# Altium PCB daughterboard.PcbDoc
Units mil, origin at the board's own origin, x right, y up, seen from the top; angles counter-clockwise.
Board outline 2450 x 4500 mil, 4 copper layers (Top Layer, Mid-Layer 1, Mid-Layer 2, Bottom Layer); 52 components, 121 nets, 371 pads, 65 vias.
Unrouted connection lines stored in the file: 18.
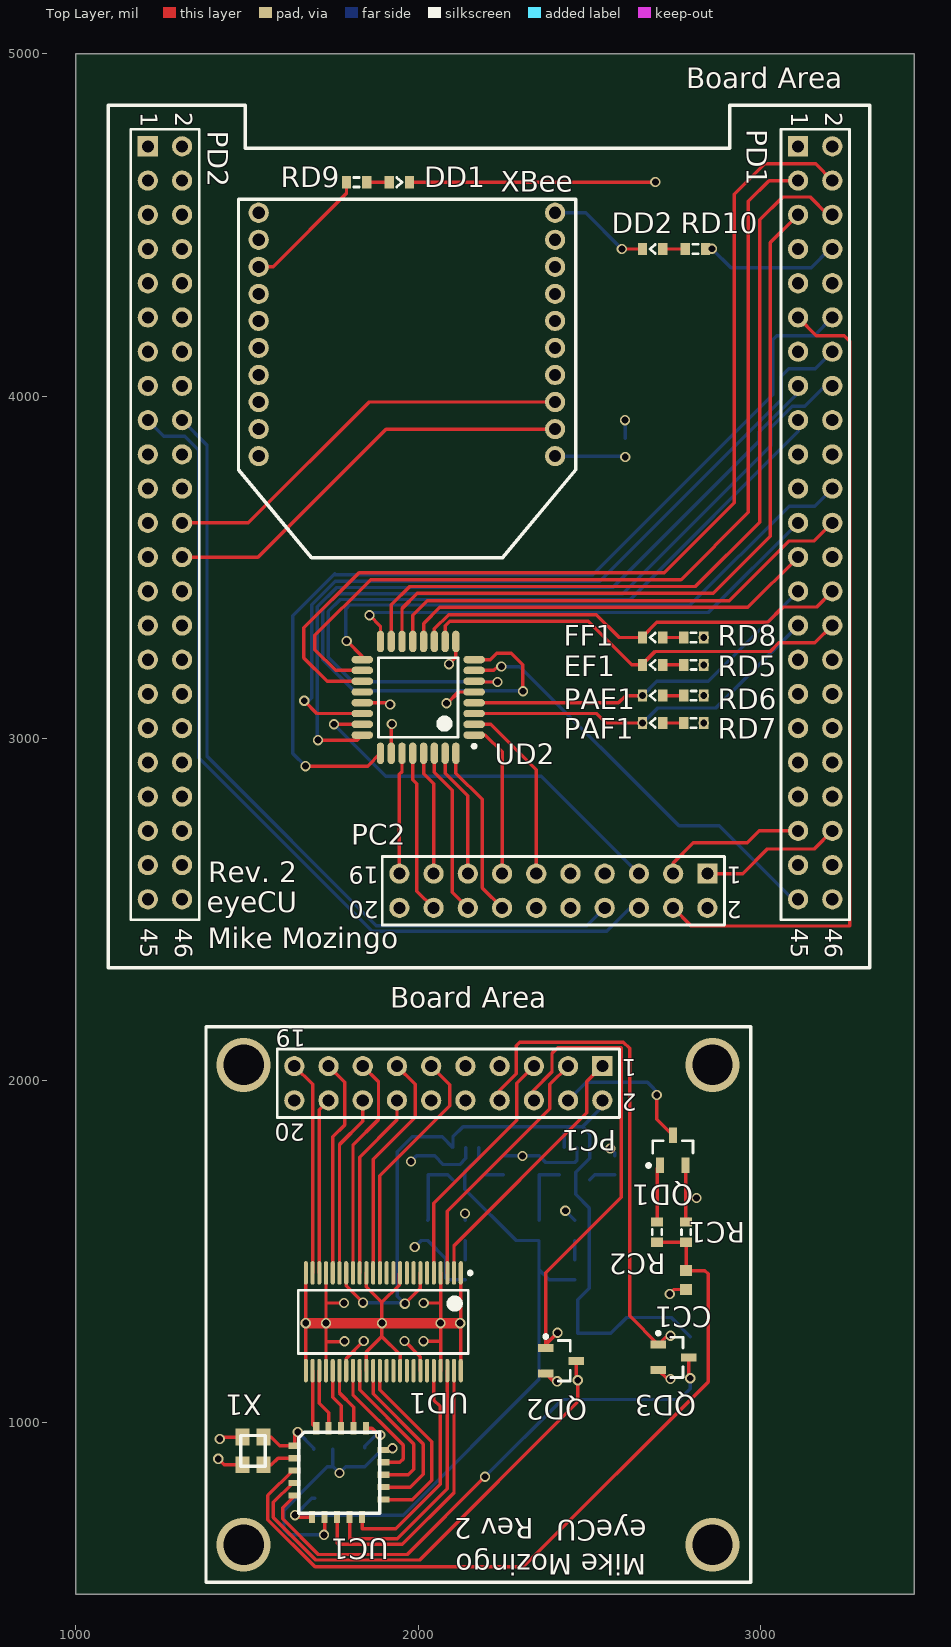
[diagram p0: Top Layer view]
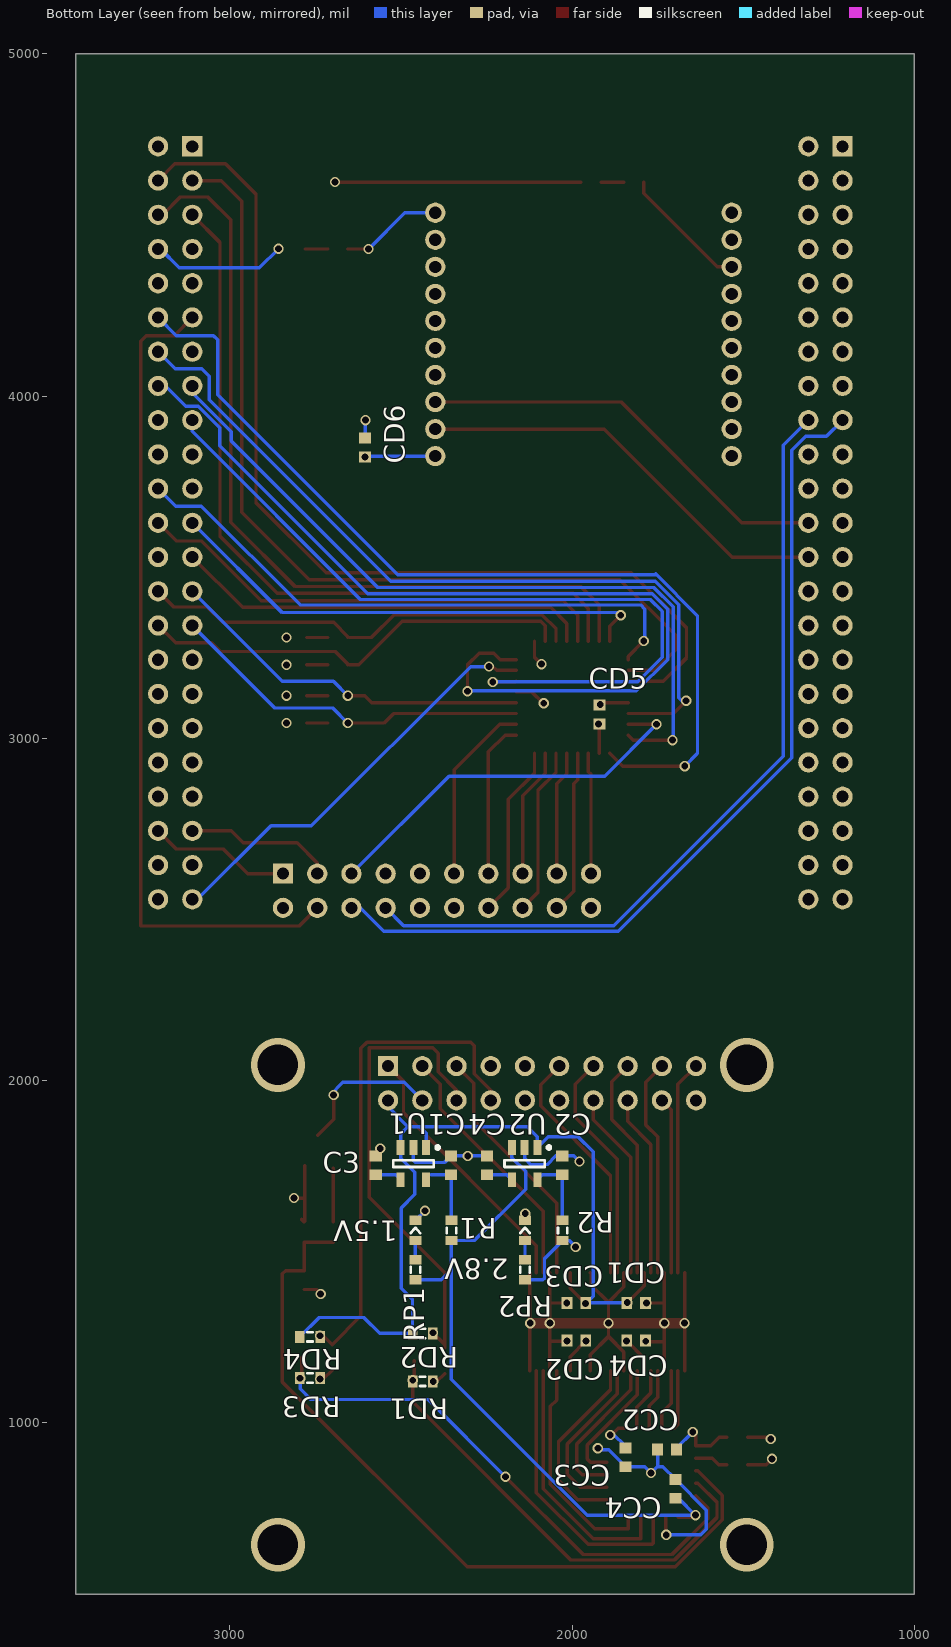
[diagram p1: Bottom Layer view, seen from below]
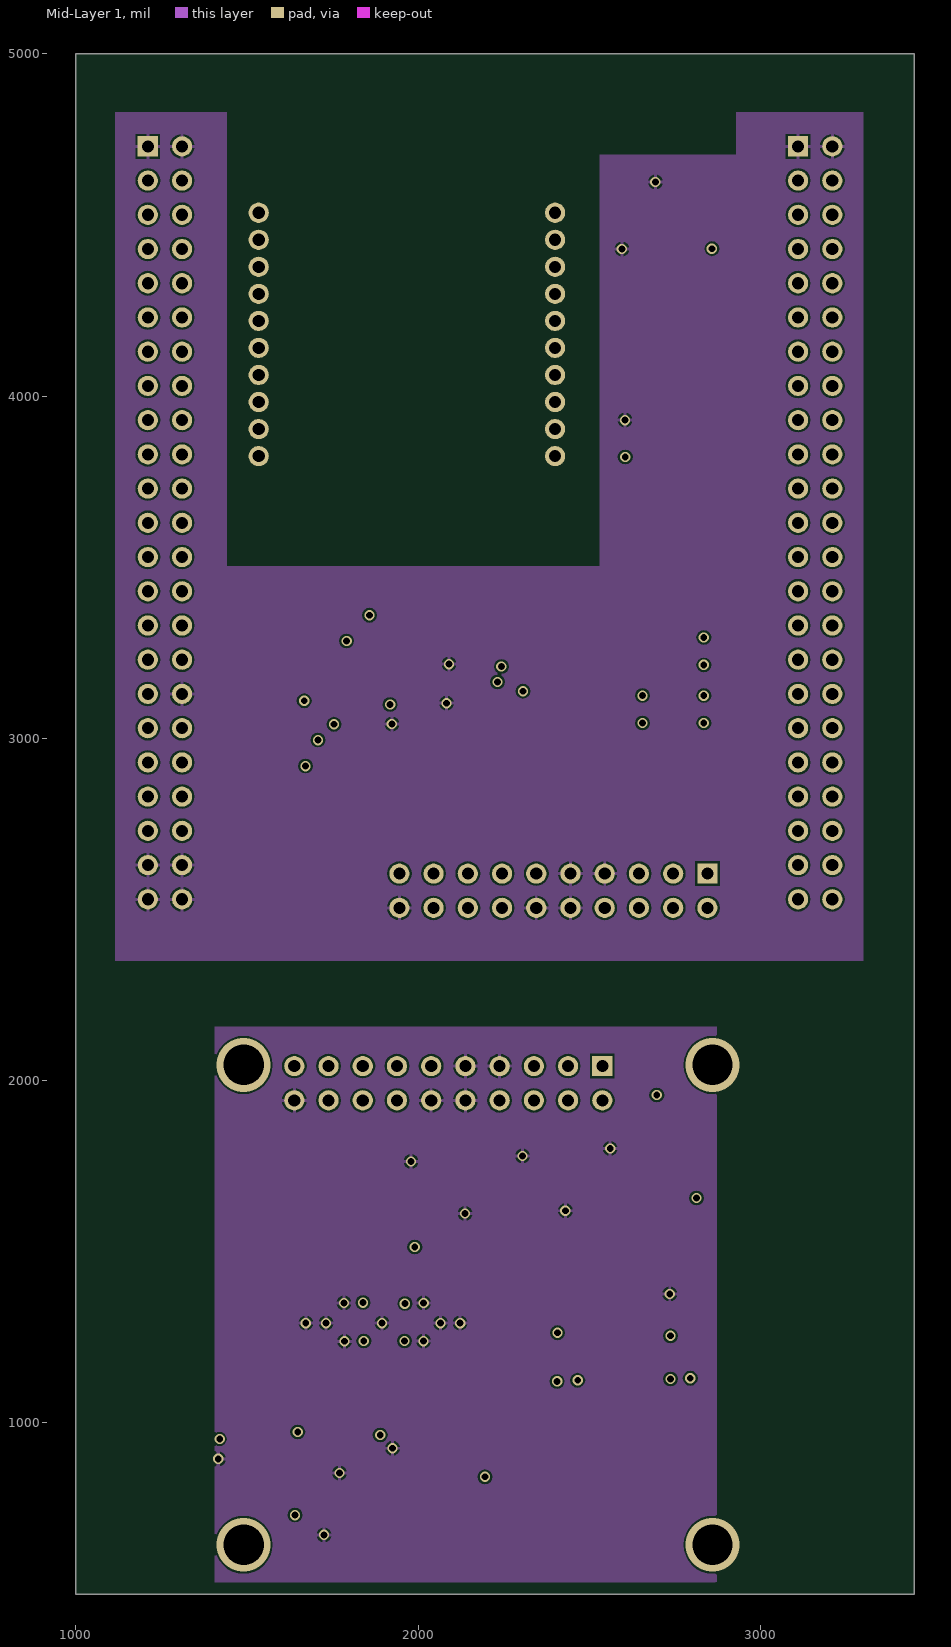
[diagram p2: Mid-Layer 1]
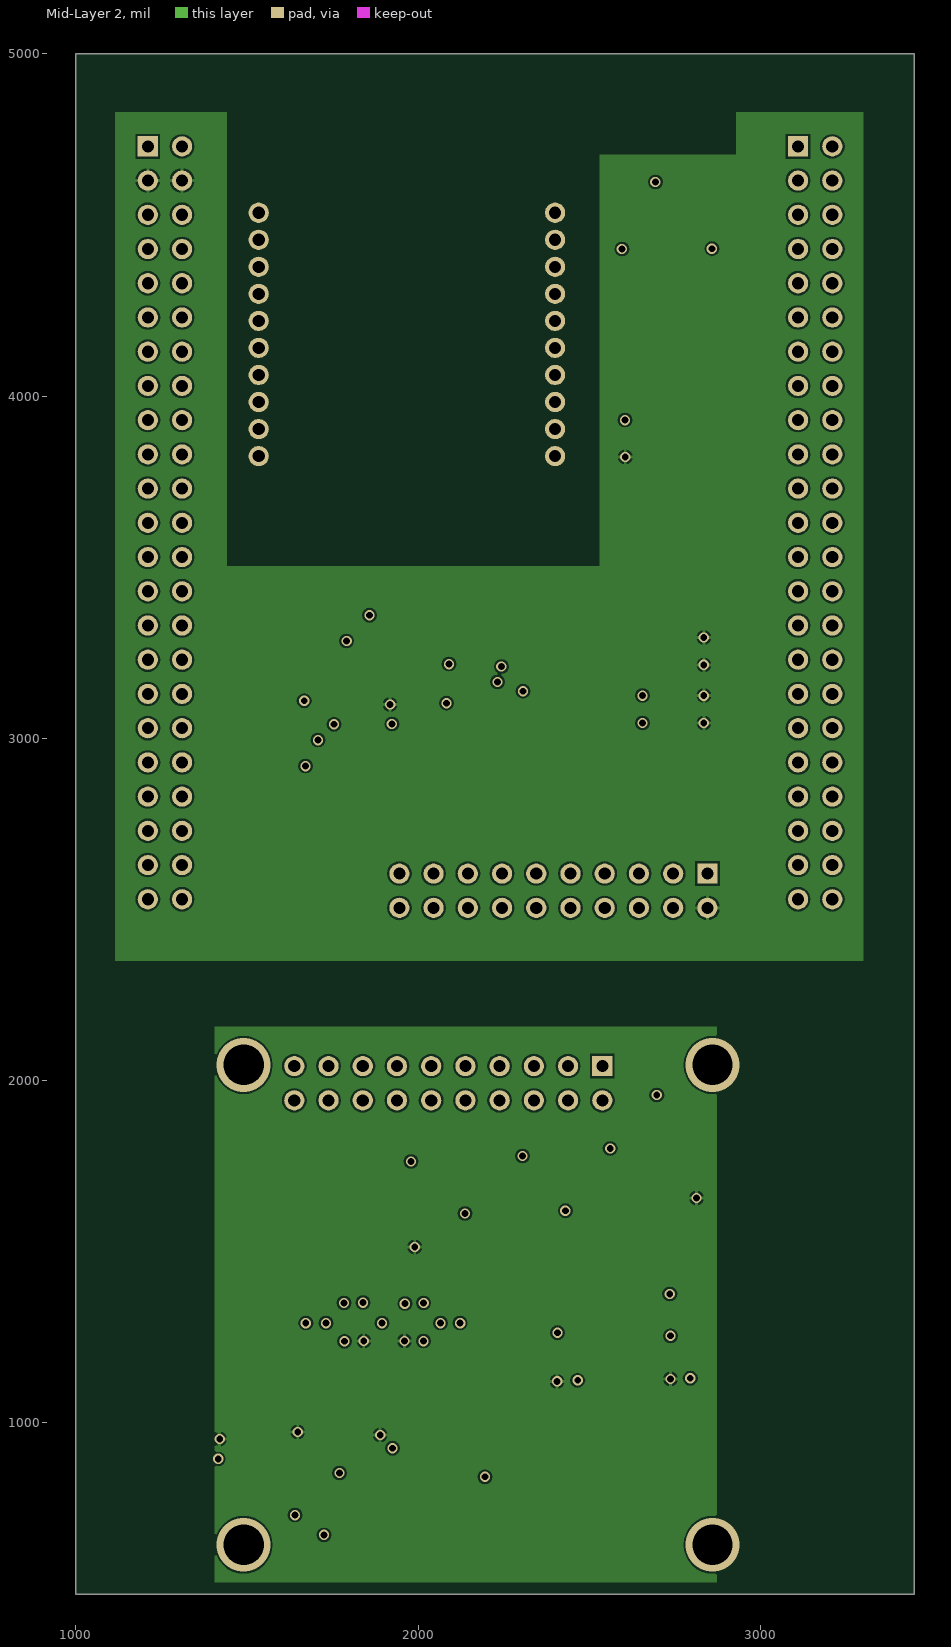
[diagram p3: Mid-Layer 2]

## Layer stack, top to bottom
Top Layer: signal copper 1.4
Dielectric: core 12.6, FR-4, Dk 4.8
Mid-Layer 1: signal copper 1.4
Dielectric: prepreg 12.6, FR-4, Dk 4.8
Mid-Layer 2: signal copper 1.4
Dielectric: core 12.6, FR-4, Dk 4.8
Bottom Layer: signal copper 1.4

## Board outline
1000,500 3450,500 3450,5000 1000,5000

## Design rules (kind name [scope] priority, off if disabled: settings)
Clearance [All] p1: gap=6
MinimumSolderMaskSliver [All] p1: minsoldermaskwidth=8
PolygonConnect [All] p1: connectstyle=Relief reliefconductorwidth=10 reliefentries=4 polygonreliefangle="90 Angle"
RoutingVias [All] p1: holewidth=20 width=30 viastyle="Through Hole" minholewidth=20 minwidth=30 maxholewidth=1000 maxwidth=1500
SilkToSilkClearance [All] p1 off: silktosilkclearance=8
SilkscreenOverComponentPads [All] p1 off: minsilkscreentomaskgap=8
SolderMaskExpansion [All] p1: expansion=4
Width [All] p1: maxlimit=100 minlimit=10 preferedwidth=10 minimp=50.000000 maximp=50.000000 favimp=50.000000
25 further rules are at their usual default settings.

## Classes and differential pairs
component class camera: 1.5V 2.8V C1 C2 C3 C4 CC1 CC2 CC3 CC4 CD1 CD2 CD3 CD4 PC1 QD1 QD2 QD3 R1 R2 RC1 RC2 RD1 RD2 RD3 RD4 RP1 RP2 U1 U2 UC1 UD1 X1
component class connections_to_beaglebone: CD4 DD1 DD2 PD1 PD2 RD9 RD10 XBee
component class CameraInterface: CD3 EF1 FF1 PAE1 PAF1 PC2 RD5 RD6 RD7 RD8 UD2

## Components (designator, comment, footprint, x,y, rotation, side; value= is the part's Value field where it differs from the comment)
1.5V "LED2" DIODE1608 2458,1562.53 r90 bottom
2.8V "LED2" DIODE1608 2138,1562.53 r90 bottom
C1 "Cap Semi" CAPC1608L 2354,1752.53 r90 bottom
C2 "Cap Semi" CAPC1608L 2029,1752.53 r90 bottom
C3 "Cap Semi" CAPC1608L 2574,1752.53 r90 bottom
C4 "Cap Semi" CAPC1608L 2249,1752.53 r90 bottom
CC1 "Cap Semi" CAPC1608L 2783,1417.53 r90 top
CC2 "Cap Semi" CAPC1608L 1723,922.53 r180 bottom
CC3 "Cap Semi" CAPC1608L 1844,899.53 r90 bottom
CC4 "Cap Semi" CAPC1608L 1698,807.53 r270 bottom
CD1 "Cap Semi" CAPC1608L 1813,1350.53 r0 bottom
CD2 "Cap Semi" CAPC1608L 1988,1240.53 r180 bottom
CD3 "Cap Semi" CAPC1608L 1988,1350.53 r180 bottom
CD4 "Cap Semi" CAPC1608L 1813,1240.53 r0 bottom
CD5 "Cap Semi" CAPC1608L 1920,3070 r90 bottom
CD6 "Cap Semi" CAPC1608L 2605,3850 r270 bottom
DD1 "LED2" DIODE1608 1945,4625 r0 top
DD2 "LED2" DIODE1608 2685,4430 r180 top
EF1 "LED2" DIODE1608 2685,3215 r180 top
FF1 "LED2" DIODE1608 2685,3295 r180 top
PAE1 "LED2" DIODE1608 2685,3125 r180 top
PAF1 "LED2" DIODE1608 2685,3045 r180 top
PC1 "Header 10X2" HDR2X10 2538,2042.53 r180 top
PC2 "Header 10X2" HDR2X10 2845,2605 r180 top
PD1 "Header 2x23" HDR2X23 3110,4730 r270 top
PD2 "Header 2x23" HDR2X23 1210,4730 r270 top
QD1 "MOSFET-N" SOT95P240-3N 2744,1796.53 r90 top
QD2 "MOSFET-N" SOT95P240-3N 2417,1181.53 r0 top
QD3 "MOSFET-N" SOT95P240-3N 2746,1191.53 r0 top
R1 "Res Semi" RESC1608L 2353,1562.53 r270 bottom
R2 "Res Semi" RESC1608L 2028,1562.53 r270 bottom
RC1 "Res3" RESC1608L 2783,1557.53 r90 top
RC2 "Res3" RESC1608L 2698,1557.53 r270 top
RD1 "Res3" RESC1608L 2437,1121.53 r0 bottom
RD2 "Res3" RESC1608L 2437,1261.53 r180 bottom
RD3 "Res3" RESC1608L 2766,1131.53 r0 bottom
RD4 "Res3" RESC1608L 2766,1251.53 r180 bottom
RD5 "Res3" RESC1608L 2805,3215 r0 top
RD6 "Res3" RESC1608L 2805,3125 r0 top
RD7 "Res3" RESC1608L 2805,3045 r0 top
RD8 "Res3" RESC1608L 2805,3295 r0 top
RD9 "Res3" RESC1608L 1820,4625 r180 top
RD10 "Res3" RESC1608L 2810,4430 r0 top
RP1 "Res3" RESC1608L 2458,1447.53 r90 bottom
RP2 "Res3" RESC1608L 2138,1447.53 r270 bottom
U1 "TPS79915DDC" TSOT23-5 2464,1757.53 r270 bottom
U2 "TPS79928DDC" TSOT23-5 2139,1757.53 r270 bottom
UC1 "TCM8230MD_1" TCM8230MD 1769,854.53 r90 top
UD1 "SN74LVCH16T245" SN74LVCH16T245 1898,1295.53 r270 top
UD2 "IDT72V241L10PF" IDT72V241L10PF 2000,3120 r180 top
X1 "KC2520B-C1 Series" KC2520B-C1 1489,954.53 r270 top
XBee "XBee" XBee 2400,3825 r180 top

## Footprints (in the part's own frame and the unit in brackets; to place one, negate y for a bottom-side part, rotate by r counter-clockwise, add the part's x,y. Pads: shape width x height; smd on the part's side, far side on the other; paste and mask are expansions set on the pad)
CAPC1608L [mm] "Chip Capacitor, Body 1.6x0.8mm, IPC High Density"
  rect 0.8x0.9 smd: 1(-0.7,0) 2(0.7,0)
  body extent -0.87,-0.48 0.87,0.48, height 1.3
DIODE1608 [mm] "Chip Resistor, Body 1.6x0.8mm, IPC High Density"
  rect 0.7x0.9 smd: 1(-0.75,0) 2(0.75,0)
  silkscreen extent -0.2,-0.35 0.2,0.35, body extent -0.85,-0.48 0.85,0.48, height 0.9
HDR2X10 [mm] "Connector; Header; 10x2 Position"
  rect 1.5x1.5 hole 0.9: 1(0,0)
  round 1.5 hole 0.9: 2(0,2.54) 3(2.54,0) 4(2.54,2.54) 5(5.08,0) 6(5.08,2.54) 7(7.62,0) 8(7.62,2.54) 9(10.16,0) 10(10.16,2.54) 11(12.7,0) 12(12.7,2.54) 13(15.24,0) 14(15.24,2.54) 15(17.78,0) 16(17.78,2.54) 17(20.32,0) 18(20.32,2.54) 19(22.86,0) 20(22.86,2.54)
  silkscreen extent -1.27,-1.27 24.13,3.81
HDR2X23 [mm] "Connector; Header; 25x2 Position"
  rect 1.5x1.5 hole 0.9: 1(0,0)
  round 1.5 hole 0.9: 2(0,2.54) 3(2.54,0) 4(2.54,2.54) 5(5.08,0) 6(5.08,2.54) 7(7.62,0) 8(7.62,2.54) 9(10.16,0) 10(10.16,2.54) 11(12.7,0) 12(12.7,2.54) 13(15.24,0) 14(15.24,2.54) 15(17.78,0) 16(17.78,2.54) 17(20.32,0) 18(20.32,2.54) 19(22.86,0) 20(22.86,2.54) 21(25.4,0) 22(25.4,2.54) 23(27.94,0) 24(27.94,2.54) 25(30.48,0) 26(30.48,2.54) 27(33.02,0) 28(33.02,2.54) 29(35.56,0) 30(35.56,2.54) 31(38.1,0) 32(38.1,2.54) 33(40.64,0) 34(40.64,2.54) 35(43.18,0) 36(43.18,2.54) 37(45.72,0) 38(45.72,2.54) 39(48.26,0) 40(48.26,2.54) 41(50.8,0) 42(50.8,2.54) 43(53.34,0) 44(53.34,2.54) 45(55.88,0) 46(55.88,2.54)
  silkscreen extent -1.27,-1.27 57.4,3.81
IDT72V241L10PF [mm] "TQFP, 32-Leads, Body 9.0x9.0mm (max), Pitch 0.80mm, IPC Medium Density"
  oval 1.6x0.55 smd: 1(-4.15,2.8) 2(-4.15,2) 3(-4.15,1.2) 4(-4.15,0.4) 5(-4.15,-0.4) 6(-4.15,-1.2) 7(-4.15,-2) 8(-4.15,-2.8) 17(4.15,-2.8) 18(4.15,-2) 19(4.15,-1.2) 20(4.15,-0.4) 21(4.15,0.4) 22(4.15,1.2) 23(4.15,2) 24(4.15,2.8)
  oval 0.55x1.6 smd: 9(-2.8,-4.15) 10(-2,-4.15) 11(-1.2,-4.15) 12(-0.4,-4.15) 13(0.4,-4.15) 14(1.2,-4.15) 15(2,-4.15) 16(2.8,-4.15) 25(2.8,4.15) 26(2,4.15) 27(1.2,4.15) 28(0.4,4.15) 29(-0.4,4.15) 30(-1.2,4.15) 31(-2,4.15) 32(-2.8,4.15)
  silkscreen extent -4.28,-2.95 2.95,3.75, body extent -3.5,-3.5 3.5,3.5, height 1.6
KC2520B-C1 [mm] "Oscillator KYOCERA"
  rect 1.25x1.05 smd: 1(-0.1,-0.05) 2(1.95,-0.05) 3(1.95,1.5) 4(-0.1,1.5)
  silkscreen extent -0.23,-0.18 2.07,1.62
RESC1608L [mm] "Chip Resistor, Body 1.6x0.8mm, IPC High Density"
  rect 0.7x0.9 smd: 1(-0.75,0) 2(0.75,0)
  silkscreen extent -0.2,-0.35 0.2,0.35, body extent -0.85,-0.48 0.85,0.48, height 0.9
SN74LVCH16T245 [mm]
  oval 1.75x0.3 smd: 1(-3.625,5.75) 2(-3.625,5.25) 3(-3.625,4.75) 4(-3.625,4.25) 5(-3.625,3.75) 6(-3.625,3.25) 7(-3.625,2.75) 8(-3.625,2.25) 9(-3.625,1.75) 10(-3.625,1.25) 11(-3.625,0.75) 12(-3.625,0.25) 13(-3.625,-0.25) 14(-3.625,-0.75) 15(-3.625,-1.25) 16(-3.625,-1.75) 17(-3.625,-2.25) 18(-3.625,-2.75) 19(-3.625,-3.25) 20(-3.625,-3.75) 21(-3.625,-4.25) 22(-3.625,-4.75) 23(-3.625,-5.25) 24(-3.625,-5.75) 25(3.625,-5.75) 26(3.625,-5.25) 27(3.625,-4.75) 28(3.625,-4.25) 29(3.625,-3.75) 30(3.625,-3.25) 31(3.625,-2.75) 32(3.625,-2.25) 33(3.625,-1.75) 34(3.625,-1.25) 35(3.625,-0.75) 36(3.625,-0.25) 37(3.625,0.25) 38(3.625,0.75) 39(3.625,1.25) 40(3.625,1.75) 41(3.625,2.25) 42(3.625,2.75) 43(3.625,3.25) 44(3.625,3.75) 45(3.625,4.25) 46(3.625,4.75) 47(3.625,5.25) 48(3.625,5.75)
  silkscreen extent -3.75,-6.3 2.35,6.58, body extent -3.1,-6.3 3.1,6.3, height 1.2
SOT95P240-3N [mm] "SOT23, 3-Leads, Body 2.9x1.3mm, Pitch 0.95mm, Lead Span 2.4mm, IPC Medium Density"
  rect 1.15x0.6 smd: 1(-1.125,0.95) 2(-1.125,-0.95) 3(1.125,0)
  silkscreen extent -1.25,-1.5 0.7,1.92, body extent -0.7,-1.5 0.7,1.5, height 1.14
TCM8230MD [mm] "VGA CAMERA MODULE 640x480"
  rect 0.45x0.6 on Top Overlay: 0(-2.275,-1.4) 0(-1.625,-1.4) 0(-0.975,-1.4) 0(-0.325,1.4) 0(-0.325,-1.4) 0(0.325,1.4) 0(0.325,-1.4) 0(0.975,1.4) 0(1.625,1.4) 0(2.275,1.4)
  rect 0.6x0.45 on Top Overlay: 0(-1.4,1.625) 0(-1.4,2.275) 0(-1.4,-0.325) 0(-1.4,0.325) 0(-1.4,0.975) 0(1.4,-0.975) 0(1.4,-0.325) 0(1.4,0.325) 0(1.4,-2.275) 0(1.4,-1.625)
  rect 0.45x0.9 smd: 1(2,3.3) 2(1.075,3.3) 3(0.15,3.3) 4(-0.775,3.3) 5(-1.7,3.3) 11(-2,-3.3) 12(-1.075,-3.3) 13(-0.15,-3.3) 14(0.775,-3.3) 15(1.7,-3.3)
  rect 0.9x0.45 smd: 6(-3.3,2) 7(-3.3,1.075) 8(-3.3,0.15) 9(-3.3,-0.775) 10(-3.3,-1.7) 16(3.3,-2) 17(3.3,-1.075) 18(3.3,-0.15) 19(3.3,0.775) 20(3.3,1.7)
  silkscreen extent -3,-3 3,3
TSOT23-5 [mm] "SOT23, 5-Leads, Body 3.0x3.0mm (max), Pitch 0.95mm, IPC Medium Density"
  rect 1.1x0.6 smd: 1(-1.2,0.95) 2(-1.2,0) 3(-1.2,-0.95) 4(1.2,-0.95) 5(1.2,0.95)
  silkscreen extent -1.32,-1.5 0.25,1.92, body extent -0.87,-1.52 0.87,1.53, height 1.1
XBee [mm]
  round 1.5 hole 0.9: 1(0,0) 2(0,-2.007) 3(0,-4.013) 4(0,-6.02) 5(0,-8.026) 6(0,-10.033) 7(0,-12.04) 8(0,-14.046) 9(0,-16.053) 10(0,-18.059) 11(21.996,-18.059) 12(21.996,-16.053) 13(21.996,-14.046) 14(21.996,-12.04) 15(21.996,-10.033) 16(21.996,-8.026) 17(21.996,-6.02) 18(21.996,-4.013) 19(21.996,-2.007) 20(21.996,0)
  silkscreen extent -1.52,-19.06 23.5,7.53, body extent -1.65,-19.18 23.62,7.62, height 2.79

## Part data
1.5V 2.8V DD1 DD2 EF1 FF1 PAE1 PAF1: "Typical RED, GREEN, YELLOW, AMBER GaAs LED"
C1 C2 C3 C4 CC1 CC2 CC3 CC4 CD1 CD2 CD3 CD4 CD5 CD6: "Capacitor (Semiconductor SIM Model)"
PC1 PC2: "Header, 10-Pin, Dual row"
QD1 QD2 QD3: "N-Channel MOSFET"
R1 R2: "Semiconductor Resistor"
RC1 RC2 RD1 RD2 RD3 RD4 RD5 RD6 RD7 RD8 RD9 RD10 RP1 RP2: "Resistor"
U1 U2: library part TPS799xxDDC, "200mA, Low Quiescent Current, Ultra-Low Noise, High PSRR  Low Dropout Linear Regulator"
UC1: "VGA CAMERA MODULE 640x480"
UD1: "16-bit bus transceiver with voltage regulation."
UD2: "36K (4K x 9) FIFO Buffer"
X1: library part KC2520B-C1, "Standard Oscillator"
XBee: "XBee wireless transmitter/reveiver"

## Via types
v1: diameter 30, hole 20, Top Layer to Bottom Layer, 61 vias
v2: diameter 157.48, hole 118.11, Top Layer to Bottom Layer, 4 vias

## Nets (pads, with @x,y where several pads share a name; then routed paths per layer and width w, separated by ;. In a path a pad name is that pad's centre, name@x,y a point inside that pad or via, vN(x,y) a via of type N, cw(c..) or ccw(c..) an arc to the next point about the centre after c; other vN are vias at no path point)
\R\E\N\1\: PD1.17 UD2.6 | length 2351.8
  Top Layer w10: UD2.6 2165.63,3165 v1(2232,3165)
  Bottom Layer w10: v1@2232,3166 1808,3166 1737,3237 1737,3371 1772,3406 2619,3406 3110,3897 PD1.17
\R\E\N\2\: PD1.16 UD2.8 | length 2802.2
  Top Layer w10: UD2.8 2210.24,3230.24 2229,3249 2272,3249 2306,3215 v1(2306,3138)
  Bottom Layer w10: v1@2306.77,3139 1812.37,3139 1721,3230.37 1721,3377.63 1766.37,3423 2598,3423 3030,3855 3030,3907.31 3093.21,3970.53 3129.53,3970.53 3189,4030 PD1.16
\R\S\: PD1.12 UD2.25 | length 2720.5
  Top Layer w10: v1(1671,2919) 1852.15,2919 UD2.25
  Bottom Layer w10: v1(1671,2919) 1634,2956 1634,3358.51 1756.49,3481 ; 1753.49,3478 2510,3478 ; 2513,3481 3036,4004 3036,4165 3048,4177 3157,4177 PD1.12
\W\E\N\1\: PD1.15 UD2.24 | length 2225.8
  Top Layer w10: v1(1707,2995) 1821.85,2995 UD2.24
  Bottom Layer w10: v1(1707,2995) 1705,2997 1705,3384.25 1761.75,3441 2568,3441 2996,3869 2996,3895.94 3110,4009.94 PD1.15
AIN0: PD2.39
AIN1: PD2.40
AIN2: PD2.37
AIN3: PD2.38
AIN4: PD2.33
AIN5: PD2.36
AIN6: PD2.35
C1_CLK: UC1.2 X1.3 | length 98.9
  Top Layer w10: X1.3 1571.23,877.76 1590.32,896.85 UC1.2
C1_DOUT0: PC1.11 PC2.11 UD1.13 UD2.2 | length 1250.9
  Top Layer w10: UD1.13 1888.16,1722.69 2092,1926.53 2092,1988.53 PC1.11 ; UD2.2 2211.74,3041.26 2345,2908 PC2.11
C1_DOUT1: PC1.13 PC2.13 UD1.14 UD2.1 | length 1134.8
  Top Layer w10: UD1.14 1868.47,1771 1991,1893.53 1991,1989.53 PC1.13 ; UD2.1 2196.24,3009.76 2245,2961 PC2.13
C1_DOUT2: PC1.14 PC2.14 UD1.16 UD2.32 | length 1056.8
  Top Layer w10: UD1.16 1829.1,1776.63 1938,1885.53 PC1.14 ; UD2.32 2110.24,2898.76 2187,2822 2187,2563 PC2.14
C1_DOUT3: PC1.15 PC2.15 UD1.17 UD2.31 | length 1033.3
  Top Layer w10: UD1.17 1809.42,1811.94 1884,1886.53 1884,1996.53 PC1.15 ; UD2.31 2078.74,2898.26 2145,2832 PC2.15
C1_DOUT4: PC1.16 PC2.16 UD1.19 UD2.30 | length 1024.5
  Top Layer w10: UD1.19 1770.05,1813.57 1838,1881.53 PC1.16 ; UD2.30 2047.24,2901.76 2100,2849 2100,2550 PC2.16
C1_DOUT5: PC1.17 PC2.17 UD1.20 UD2.29 | length 1001.8
  Top Layer w10: PC1.17 1785,1995.53 1785,1870.53 1750.36,1835.89 UD1.20 ; UD2.29 2015.75,2897.25 2045,2868 PC2.17
C1_DOUT6: PC1.18 PC2.18 UD1.22 UD2.28 | length 992.2
  Top Layer w10: UD1.22 1710.99,1915.52 PC1.18 ; UD2.28 1984.25,2879.75 1996,2868 1996,2554 PC2.18
C1_DOUT7: PC1.19 PC2.19 UD1.23 UD2.27 | length 981.2
  Top Layer w10: PC1.19 1691.31,1989.22 UD1.23 ; PC2.19 1945,2895 1952.76,2902.76 UD2.27
C1_RST: PC1.4 PC2.4 PD1.11 QD1.3 | length 2916.4
  Top Layer w10: v1(2697,1958) 2707.47,1958 2697,1968.47 2697,1887.82 QD1.3 ; PC2.4 2798,2452 3261,2452 3261,4161 3245,4177 3163,4177 PD1.11
  Bottom Layer w10: PC1.4 2491,1995.53 2669.94,1995.53 2707.47,1958 v1(2697,1958)
C_DCLK: UC1.10 UD1.44 | length 655.8
  Top Layer w10: UC1.10 1835.93,690.6 1934.07,690.6 2064,820.53 2064,1048.53 2045.64,1066.89 UD1.44
C_HD: UC1.9 UD1.46 | length 755
  Top Layer w10: UC1.9 1799.51,661.04 1938.51,661.04 2085.01,807.54 UD1.46
C_HORIZONTALSYNC: PC1.3 PC2.3 PD1.41 UD1.3 | length 1185.4
  Top Layer w10: UD1.3 2085.01,1618.54 2385,1918.53 2385,1989.53 PC1.3 ; PC2.3 2745,2636 2804,2695 2961,2695 2996,2730 PD1.41
C_SCL: QD2.3 RD1.2 UC1.4 | length 1383.2
  Top Layer w10: UC1.4 1633.36,824.02 1577,767.65 1577,723.63 1701.1,599.53 2004,599.53 2466,1061.53 v1(2466,1124.53) 2461.29,1129.24 QD2.3
C_SDA: QD3.3 RD3.2 UC1.5 | length 1611.6
  Top Layer w10: UC1.5 1604,752.52 1604,720 1708.47,615.53 1968,615.53 v1(2195,842.53) ; QD3.3 2790.29,1135.24 v1(2795,1130.53)
  Bottom Layer w10: v1(2195,842.53) 2421,1068.53 2764,1068.53 2795,1099.53 v1(2795,1130.53) RD3.2@2795.53,1131.06
C_SDCLK: PC1.5 PC2.5 UD1.5 UD2.23 | length 1880.2
  Top Layer w10: v1(1753.74,3041.26) UD2.23 ; UD1.5 2045.64,1642.17 2288,1884.53 2288,1992.53 PC1.5
  Bottom Layer w10: v1(1753.74,3041.26) 1905,2890 2360,2890 PC2.5
C_VD: UC1.8 UD1.47 | length 838.4
  Top Layer w10: UC1.8 1763.09,648.43 1766.49,645.04 1953.51,645.04 2104.69,796.22 UD1.47
C_VERTICALSYNC: PC1.1 PC2.1 PD1.42 UD1.2 | length 1200.5
  Top Layer w10: UD1.2 2104.69,1518.22 2493,1906.53 2493,1997.53 PC1.1 ; PC2.1 2948,2605 3020,2677 3157,2677 PD1.42
CAMERA_D0: PD1.25 UD2.12 | length 1227.1
  Top Layer w10: UD2.12 2015.75,3335.75 2063,3383 2963,3383 PD1.25
CAMERA_D1: PD1.24 UD2.13 | length 1414.3
  Top Layer w10: UD2.13 1984.25,3360.25 2026,3402 2909,3402 3084,3577 3157,3577 PD1.24
CAMERA_D2: PD1.5 UD2.14 | length 2232.7
  Top Layer w10: UD2.14 1952.76,3379.76 1997,3424 2862,3424 3029,3591 3029,4449 PD1.5
CAMERA_D3: PD1.6 UD2.15 | length 2428
  Top Layer w10: UD2.15 1921.26,3390.26 1975,3444 2810,3444 2998,3632 2998,4515 3065,4582 3145,4582 3197,4530 PD1.6
CAMERA_D4: PD1.23 UD2.16 | length 1453.6
  Top Layer w10: v1(1858,3360) 1889.76,3328.24 UD2.16
  Bottom Layer w10: v1(1858,3360) 1866,3368 2848,3368 PD1.23
CAMERA_D5: PD1.22 UD2.17 | length 1735.7
  Top Layer w10: v1(1791,3285) 1836.61,3239.39 UD2.17
  Bottom Layer w10: v1(1791,3285) 1788,3288 1788,3378 1800,3390 2794.63,3390 3083.63,3679 3159,3679 PD1.22
CAMERA_D6: PD1.3 UD2.18 | length 2700.3
  Top Layer w10: UD2.18 1758.74,3198.74 1698,3259.48 1698,3301 1861,3464 2768,3464 2965,3661 2965,4570 3025,4630 PD1.3
CAMERA_D7: PD1.4 UD2.19 | length 2940.4
  Top Layer w10: UD2.19 1733.76,3167.24 1666,3235 1666,3323 1827,3484 2719,3484 2924,3689 2924,4590 3013,4679 3161,4679 PD1.4
CLKOUT2: PD2.41
DGND: 1.5V.2 2.8V.2 C1.2 C2.2 C3.2 C4.2 CC1.1 CC2.1 CC3.1 CC4.1 CD1.1 CD2.1 CD3.1 CD4.1 CD5.1 CD6.1 DD1.2 DD2.2 PC1.7 PC1.9 PC1.10 PC1.12 PC1.20 PC2.7 PC2.9 PC2.10 PC2.12 PC2.20 PD1.1 PD1.2 PD2.1 PD2.2 PD2.34 PD2.43 PD2.44 PD2.45 PD2.46 U1.2 U2.2 UC1.7 UC1.15 UD1.1 UD1.4 UD1.10 UD1.15 UD1.21 UD1.24 UD1.25 UD1.28 UD1.34 UD1.39 UD1.45 UD1.48 UD2.5 UD2.9 UD2.26 X1.2 XBee.10 | length 5098.2
  Top Layer w10: v1(1416,895) 1433.24,877.76 X1.2 ; UD1.25 v1(1671.62,1291.53) UD1.24 ; v1(1725,673) 1726.68,674.68 UC1.7 ; UD1.28 1730.68,1237.53 ; UD1.21 1730.68,1350.53 ; v1@1766,849.53 v1(1770,853.53) ; v1(1783,1350.53) 1730.68,1350.53 ; v1(1785,1238.53) 1785,1237.53 1730.68,1237.53 ; UD1.34 1848.79,1207.32 1894,1252.53 ; UD1.15 1848.79,1397.48 1894,1352.27 ; UC1.15 1915.46,921.46 1920,926 v1(1925,926) ; UD2.26 1921.26,3040.26 v1(1923,3042) ; UD1.39 1947.21,1199.32 1894,1252.53 ; UD1.10 1944.43,1435.46 1944.43,1402.7 1894,1352.27 ; DD1.2 2692,4625 v1(2693,4626) ; v1(2015.56,1238.97) 2016,1238.53 2065.32,1238.53 ; v1(2016,1350.53) 2065.32,1350.53 ; UD1.45 2065.32,1238.53 ; UD1.4 2065.32,1350.53 ; v1(2083,3103) 2085,3103 2117.75,3135.75 UD2.5 ; v1(2090,3217) 2110.24,3237.24 UD2.9 ; v1(2122.53,1291.53) 2122.38,1291.53 v1@2124.38,1289.53 ; UD1.48 v1@2124.38,1289.53 ; UD1.1 v1@2124.38,1289.53 ; v1(2595,4430) DD2.2 ; v1(2735,1377) 2747.97,1389.97 CC1.1 ; 1730.68,1237.53 v1(1730.68,1291.53) 1730.68,1350.53 ; 1894,1252.53 v1(1894,1291.53) 1894,1352.27 ; 2065.32,1238.53 v1(2065.32,1291.53) 2065.32,1350.53
  Top Layer w30: v1(1671.62,1291.53) v1(1730.68,1291.53) v1(1894,1291.53) v1(2065.32,1291.53) v1@2122.38,1291.53
  Bottom Layer w10: v1(1725,673) 1624,673 1608,689 1608,745.09 CC4.1 1734.88,871.97 1751.56,871.97 v1(1770,853.53) 1788.44,871.97 CC3.1 1893.49,921.46 1915.46,921.46 1920,926 v1(1925,926) ; 1750.56,875.85 CC2.1 ; v1(1979,1764) 1995.09,1780.09 2047.91,1780.09 2073,1755 2121,1755 2139,1773 U2.2 ; v1(2137,1612) 2138,1611 2.8V.2 ; C4.2 v1(2305,1780.09) C1.2 2373.09,1761 2457,1761 2464,1768 U1.2 ; XBee.10 2489,4536 v1(2595,4430) ; v1(2430,1620) 2430,1620.06 1.5V.2 ; v1(2561,1802) 2574,1789 C3.2 ; v1(2604,3930) 2605,3929 CD6.1
E\F\: EF1.2 PD1.30 UD2.10 | length 1278
  Top Layer w10: UD2.10 2078.74,3329.11 2091.63,3342 2497,3342 2624,3215 EF1.2@2649.47,3215 ; EF1.2 2655.47,3217.47 2692,3254 3029,3254 3054,3279 3159,3279 PD1.30
EHRPWM1A: PD2.14
EHRPWM1B: PD2.16
EHRPWM2A: PD1.19
EHRPWM2B: PD1.13
F\F\: FF1.2 PD1.28 UD2.11 | length 1296
  Top Layer w10: UD2.11 2047.24,3320.24 2089,3362 2520,3362 2587,3295 FF1.2@2649.47,3295 ; FF1.2 2655.47,3297.47 2697,3339 3021,3339 3066,3384 3164,3384 PD1.28
GPIO0_7: PD2.42
GPIO0_26: PD1.14 UD2.22 | length 2349.6
  Top Layer w10: v1(1667,3110) 1704.24,3072.76 UD2.22
  Bottom Layer w10: v1(1667,3110) 1680,3110 1689,3119 1689,3390.88 1757.12,3459 2530,3459 3061,3990 3061,4058 3083,4080 3160,4080 PD1.14
GPIO1_16: PD2.15
GPIO1_17: PD2.23
GPIO1_28: PD2.12
GPIO1_29: PD1.26
GPIO1_30: PD1.21
GPIO1_31: PD1.20
GPIO2_1: PD1.18
GPIO2_6: PD1.45 UD2.7 | length 1232.9
  Top Layer w10: UD2.7 2220.74,3198.74 2232,3210 v1(2243,3210)
  Bottom Layer w10: v1(2243,3210) 2297,3210 2762,2745 2880,2745 3095,2530 PD1.45
GPIO2_7: PD1.46
GPIO2_8: PD1.43
GPIO2_9: PD1.44
GPIO2_12: PD1.39
GPIO2_13: PD1.40
GPIO2_22: PAE1.2 PD1.27 UD2.4 | length 1081.5
  Top Layer w10: UD2.4 2585.25,3104.25 2606,3125 v1(2655.47,3125)
  Bottom Layer w10: v1(2655.47,3125) 2697.47,3167 2847,3167 PD1.27
GPIO2_23: PAF1.2 PD1.29 UD2.3 | length 1076.2
  Top Layer w10: UD2.3 2522.24,3072.76 2550,3045 v1(2655.47,3045)
  Bottom Layer w10: v1(2655.47,3045) 2699.47,3089 2869,3089 PD1.29
GPIO3_19: PD2.27
GPIO3_21: PD2.25
I2C1_SCL: PC1.6 PC2.6 PD2.17 QD2.1 RD2.2 | length 4003.3
  Top Layer w10: PC1.6 2338,1972.53 2391,2025.53 2391,2079.53 2408,2096.53 2593,2096.53 2593,1659.53 2372.71,1439.24 QD2.1 2372.71,1229.24 v1(2407,1263.53)
  Bottom Layer w10: PD2.17 1257,3883 1318,3883 1359,3842 1359,2944 1866,2437 2551,2437 2619,2505 PC2.6
I2C1_SDA: PC1.8 PC2.8 PD2.18 QD3.1 RD4.2 | length 3869.7
  Top Layer w10: PC1.8 2238,1972.53 2286,2020.53 2286,2101.53 2297,2112.53 2599.63,2112.53 2618,2094.16 2618,1312.64 QD3.1 2727.31,1254.53 v1(2737,1254.53)
  Bottom Layer w10: PD2.18 1383,3857 1383,2948 1878,2453 2493,2453 PC2.8
I2C2_SCL: PD2.19
I2C2_SDA: PD2.20
LED_BLINK: PD1.8 RD10.2 | length 398
  Bottom Layer w10: v1(2858,4431) 2914,4375 3148,4375 3203,4430 PD1.8
Net1.5V_1: 1.5V.1 RP1.2 | length 55.9
  Bottom Layer w10: RP1.2 1.5V.1
Net2.8V_1: 2.8V.1 RP2.1 | length 55.9
  Bottom Layer w10: RP2.1 2.8V.1
NetC1_1: C1.1 R1.1 U1.5 | length 191.2
  Bottom Layer w10: R1.1 2354,1593.06 C1.1 2411.91,1724.97
NetC2_1: C2.1 R2.1 U2.5 | length 212
  Bottom Layer w10: R2.1 2029,1593.06 C2.1 2086.91,1724.97 U2.5
NetC3_1: C3.1 U1.4 | length 78.7
  Bottom Layer w10: U1.4 2516.09,1724.97 C3.1
NetC4_1: C4.1 U2.4 | length 78.7
  Bottom Layer w10: U2.4 2191.09,1724.97 C4.1
NetCC1_2: CC1.2 RC1.1 RC2.2 UC1.3 | length 2297.6
  Top Layer w10: UC1.3 1633.36,860.43 1561,788.07 1561,717 1698.47,579.53 2307,579.53 2847,1119.53 2847,1435.53 2837.44,1445.09 CC1.2 RC1.1 RC2.2
NetDD1_1: DD1.1 RD9.1 | length 65.9
  Top Layer w10: RD9.1 DD1.1
NetDD2_1: DD2.1 RD10.1 | length 65.9
  Top Layer w10: DD2.1 RD10.1
NetEF1_1: EF1.1 RD5.1 | length 60.9
  Top Layer w10: EF1.1 RD5.1
NetFF1_1: FF1.1 RD8.1 | length 60.9
  Top Layer w10: FF1.1 RD8.1
NetPAE1_1: PAE1.1 RD6.1 | length 60.9
  Top Layer w10: PAE1.1 RD6.1
NetPAF1_1: PAF1.1 RD7.1 | length 60.9
  Top Layer w10: PAF1.1 RD7.1
NetQD1_1: QD1.1 RC2.1 | length 156.6
  Top Layer w10: RC2.1 QD1.1@2698,1743.64
NetRD9_2: RD9.2 XBee.13 | length 377.8
  Top Layer w10: XBee.13 1576,4378 1790.47,4592.47 RD9.2
NetUC1_11: UC1.11 UD1.36 | length 547.8
  Top Layer w10: UD1.36 1888.16,1096.37 2040,944.53 2040,832.53 1983.26,775.79 UC1.11
NetUC1_12: UC1.12 UD1.35 | length 494.9
  Top Layer w10: UD1.35 1868.47,1085.06 2015,938.53 2015,850.53 1976.68,812.2 UC1.12
NetUC1_13: UC1.13 UD1.33 | length 448.2
  Top Layer w10: UD1.33 1829.1,1096.43 1987,938.53 1987,864.72 1970.91,848.62 UC1.13
NetUC1_14: UC1.14 UD1.32 | length 380
  Top Layer w10: UD1.32 1809.42,1082.11 1956,935.53 1956,894.53 1946.51,885.04 UC1.14
NetUC1_17: UC1.17 UD1.30 | length 185.5
  Top Layer w10: UD1.30 1770.05,1087.48 1811.32,1046.2 UC1.17
NetUC1_18: UC1.18 UD1.29 | length 178.5
  Top Layer w10: UD1.29 1750.36,1075.17 1774.91,1050.62 UC1.18
NetUC1_19: UC1.19 UD1.27 | length 179.8
  Top Layer w10: UD1.27 1710.99,1057.54 1738.49,1030.04 UC1.19
NetUC1_20: UC1.20 UD1.26 | length 172.8
  Top Layer w10: UD1.26 1691.31,995.21 UC1.20
PWR_BUT: PD2.9
RX: PD2.26 XBee.2 | length 1244.9
  Top Layer w10: PD2.26 1532,3530 1906,3904 XBee.2
SPI1_CS0: PD2.28
SPI1_D0: PD2.29
SPI1_D1: PD2.30
SPI1_SCLK: PD2.31
SYS_5V: PD2.7 PD2.8
SYS_RESETN: PD2.10
TIMER4: PD1.7
TIMER5: PD1.9
TIMER6: PD1.10
TX: PD2.24 XBee.3 | length 1236.2
  Top Layer w10: PD2.24 1504,3630 1857,3983 XBee.3
UART2_RXD: PD2.22
UART2_TXD: PD2.21
UART3_CTSN: PD1.36
UART3_RTSN: PD1.34
UART4_CTSN: PD1.35
UART4_RTSN: PD1.33
UART4_RXD: PD2.11
UART4_TXD: PD2.13
UART5_CTSN: PD1.31
UART5_RTSN: PD1.32
UART5_RXD: PD1.38
UART5_TXD: PD1.37
VCC1.5: CC4.2 R1.2 RP1.1 U2.3 UC1.6 | length 1949
  Top Layer w10: v1(1640,730.53) 1645.92,724.61 UC1.6
  Bottom Layer w10: CC4.2 1689.44,779.97 v1(1640,730.53) 1956,730.53 2353,1127.53 2353,1447.53 ; U2.3 2176.4,1775.4 2136,1735 2136,1683 2286,1533 R1.2 2353,1447.53 ; RP1.1 2382.53,1418 2353,1447.53
VCC2.8: CC2.2 CC3.2 CD2.2 CD4.2 QD1.2 QD2.2 QD3.2 R2.2 RC1.2 RD1.1 RD3.1 RP2.2 UC1.1 UC1.16 UD1.31 UD1.42 X1.1 X1.4 | length 1149.3
  Top Layer w10: v1(1420,953) 1425.46,958.46 X1.1 ; X1.4 1570.06,958.46 1595.26,933.27 UC1.1 1639.08,964.61 v1(1648,973.53) ; UD1.31 1789.73,1188.26 v1(1841,1239.53) ; UC1.16 1865.08,984.45 1884.53,965 v1(1889,965) ; v1(1960,1239.53) 2006.27,1193.26 UD1.42 ; QD2.2 2395.31,1121.53 v1(2406,1121.53) ; QD3.2 2727.31,1128.53 v1(2737,1128.53) ; RC1.2@2781.4,1588.65 2781.4,1656 ; QD1.2 2781.4,1656 ; RC1.2 RC1.2@2790.94,1595 ; v1(2813,1657) 2812,1656 2781.4,1656
  Bottom Layer w10: v1(1648,973.53) 1695.44,926.09 CC2.2 ; v1(1841,1239.53) CD4.2@1841,1240.09 ; CC3.2 1844,931.53 1881,968.53 1884.53,965 v1(1889,965) ; v1(1990,1514) 2009,1533 R2.2 2081,1480 2081,1422.53 2085.53,1418 RP2.2 ; v1(2406,1121.53) RD1.1
VDD_3V3EXP: CD1.2 CD3.2 CD5.2 CD6.2 PC1.2 PC2.2 PD2.3 PD2.4 RD2.1 RD4.1 RD5.2 RD6.2 RD7.2 RD8.2 U1.1 U1.3 U2.1 UD1.7 UD1.18 UD2.21 XBee.1 | length 2894.4
  Top Layer w10: UD1.18 1789.73,1400.8 v1(1839,1351.53) ; UD2.21 1912.75,3104.25 v1(1918,3099) ; v1(1961,1348.53) 2006.27,1393.8 UD1.7
  Bottom Layer w10: v1(1839,1351.53) CD3.2@1958,1351.53 ; v1(1961,1348.53) CD3.2@1958,1351.53 ; XBee.1 2507.44,3825 2602.44,3825 v1(2605,3822.44) ; U1.1 2426.6,1846.13 2446,1865.53 ; PC1.2 2538,1923.53 2480,1865.53 ; RD4.1 2739.06,1308 2609,1308 2562.53,1261.53 RD2.1 2466.53,1360.53 2500,1394 2500,1628 2460,1668 2460,1732 2501.4,1773.4 U1.3 2501.4,1844.13 2480,1865.53 ; CD3.2@1958,1351.53 1939,1370.53 1939,1792 1983,1836 2070.37,1836 U2.1 2101.6,1836.13 2131,1865.53 2446,1865.53 ; 2446,1865.53 2480,1865.53
  other v1: 2834.53,3045 2834.53,3125 2834.53,3215 2834.53,3295
VDD_5V: PD2.5 PD2.6
VDD_ADC: PD2.32
pads on no net: UC1.0 UD1.6 UD1.8 UD1.9 UD1.11 UD1.12 UD1.37 UD1.38 UD1.40 UD1.41 UD1.43 UD2.20 XBee.4 XBee.5 XBee.6 XBee.7 XBee.8 XBee.9 XBee.11 XBee.12 XBee.14 XBee.15 XBee.16 XBee.17 XBee.18 XBee.19 XBee.20
copper on no net:
  other v2: 1490,644 2860,644 1490,2046 2860,2046

## Polygon pours and split planes (outlines as drawn)
DGND on Mid-Layer 1 "Daughter GND" (solid, pour order 1001): 3300,2350 1115,2350 1115,4830 1440,4830 1440,3503 2531,3503 2531,4705 2930,4705 2930,4830 3300,4830
DGND on Mid-Layer 1 "CAM GND" (solid, pour order 1000): 1406,535 1406,2114 1406,2157 1407,2158 2872,2158 2872,536 2869,533 2867,535 1406,535
VDD_3V3EXP on Mid-Layer 2 "Daughter VCC" (solid, pour order 1003): 3300,2350 1115,2350 1115,4830 1440,4830 1440,3503 2531,3503 2531,4705 2930,4705 2930,4830 3300,4830
VCC2.8 on Mid-Layer 2 "CAM VCC" (solid, pour order 1002): 1406,535 2872,535 2872,2158 1406,2158 1406,535

## Silkscreen, mask and mechanical layers (free items; w line width, h text height)
Top Overlay:
  lines w10: 1095,2330 1175,2330 3320,2330 3320,4770 3320,4786.25 3320,4818.75 3320,4850 2910,4850 2910,4725 1495,4725 1495,4850 1480,4850 1095,4850 1095,2390 1095,2330 ; 1380,535 2972,535 2972,2158 1380,2158 1380,535
  text "Board Area" at 2783,4900 h60
  text "Rev. 2" at 1386,2580 h60
  text "eyeCU" at 1382,2492 h60
  text "Mike Mozingo" at 1385,2387 h60
  text "Board Area" at 1918,2213 h60
  text "Rev 2" at 2338,721 h60 r180
  text "eyeCU" at 2668,716 h60 r180
  text "Mike Mozingo" at 2667,617 h60 r180

## Text inside footprints (layer, text, board x,y; h text height)
PC1: Top Overlay "20" at 1669,1874 h50 r180; Top Overlay "19" at 1672,2149 h50 r180; Top Overlay "1" at 2638,2062.53 h50 r180; Top Overlay "2" at 2638,1962.53 h50 r180
PC2: Top Overlay "20" at 1885,2525 h50 r180; Top Overlay "19" at 1885,2625 h50 r180; Top Overlay "1" at 2945,2625 h50 r180; Top Overlay "2" at 2945,2525 h50 r180
PD1: Top Overlay "46" at 3190,2445 h50 r270; Top Overlay "45" at 3090,2445 h50 r270; Top Overlay "1" at 3090,4830 h50 r270; Top Overlay "2" at 3190,4830 h50 r270
PD2: Top Overlay "46" at 1290,2445 h50 r270; Top Overlay "45" at 1190,2445 h50 r270; Top Overlay "1" at 1190,4830 h50 r270; Top Overlay "2" at 1290,4830 h50 r270